# Allegro board PSU-B1-1.brd
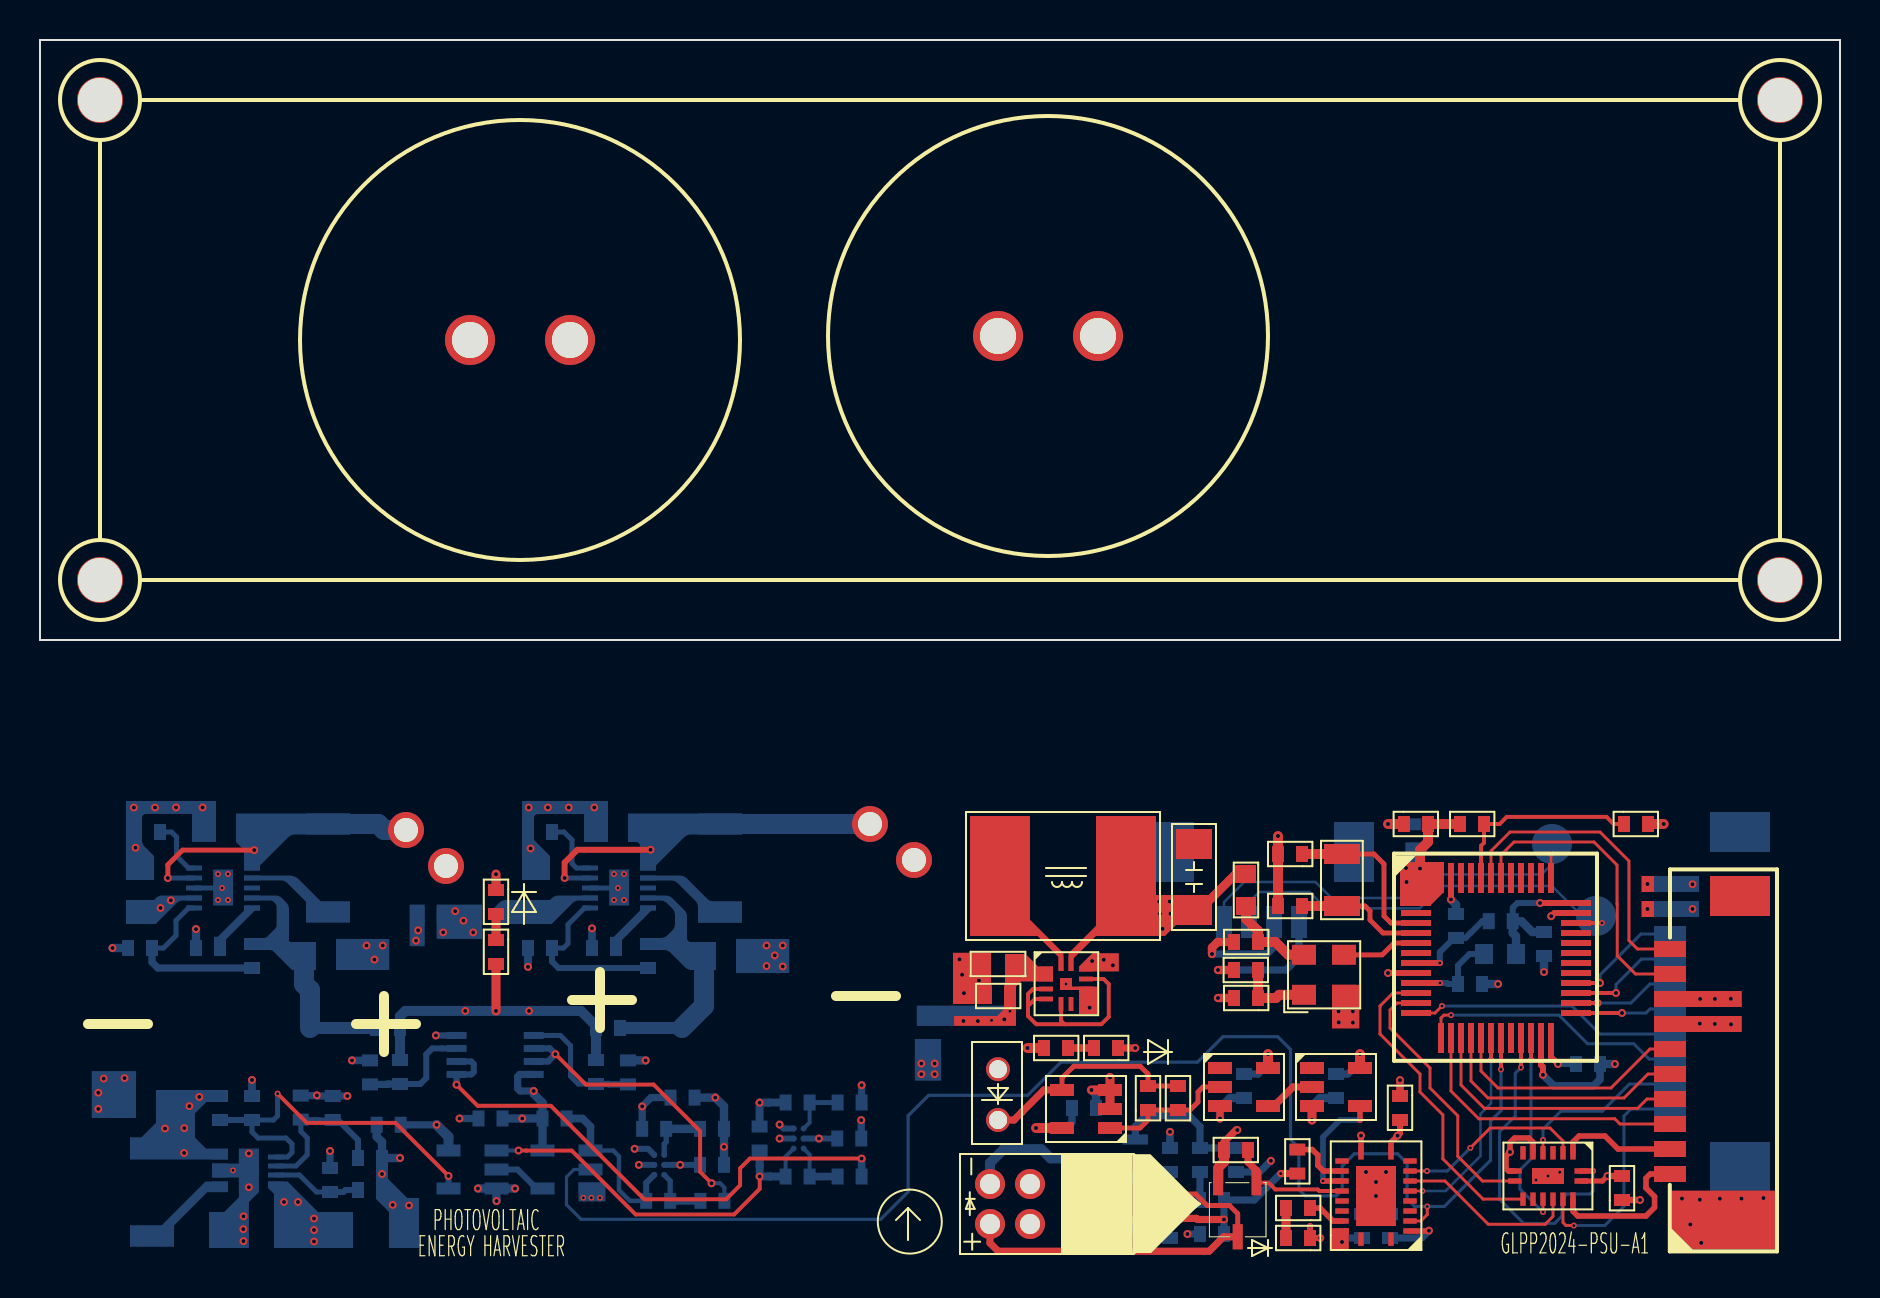
[diagram p0: board, top side]
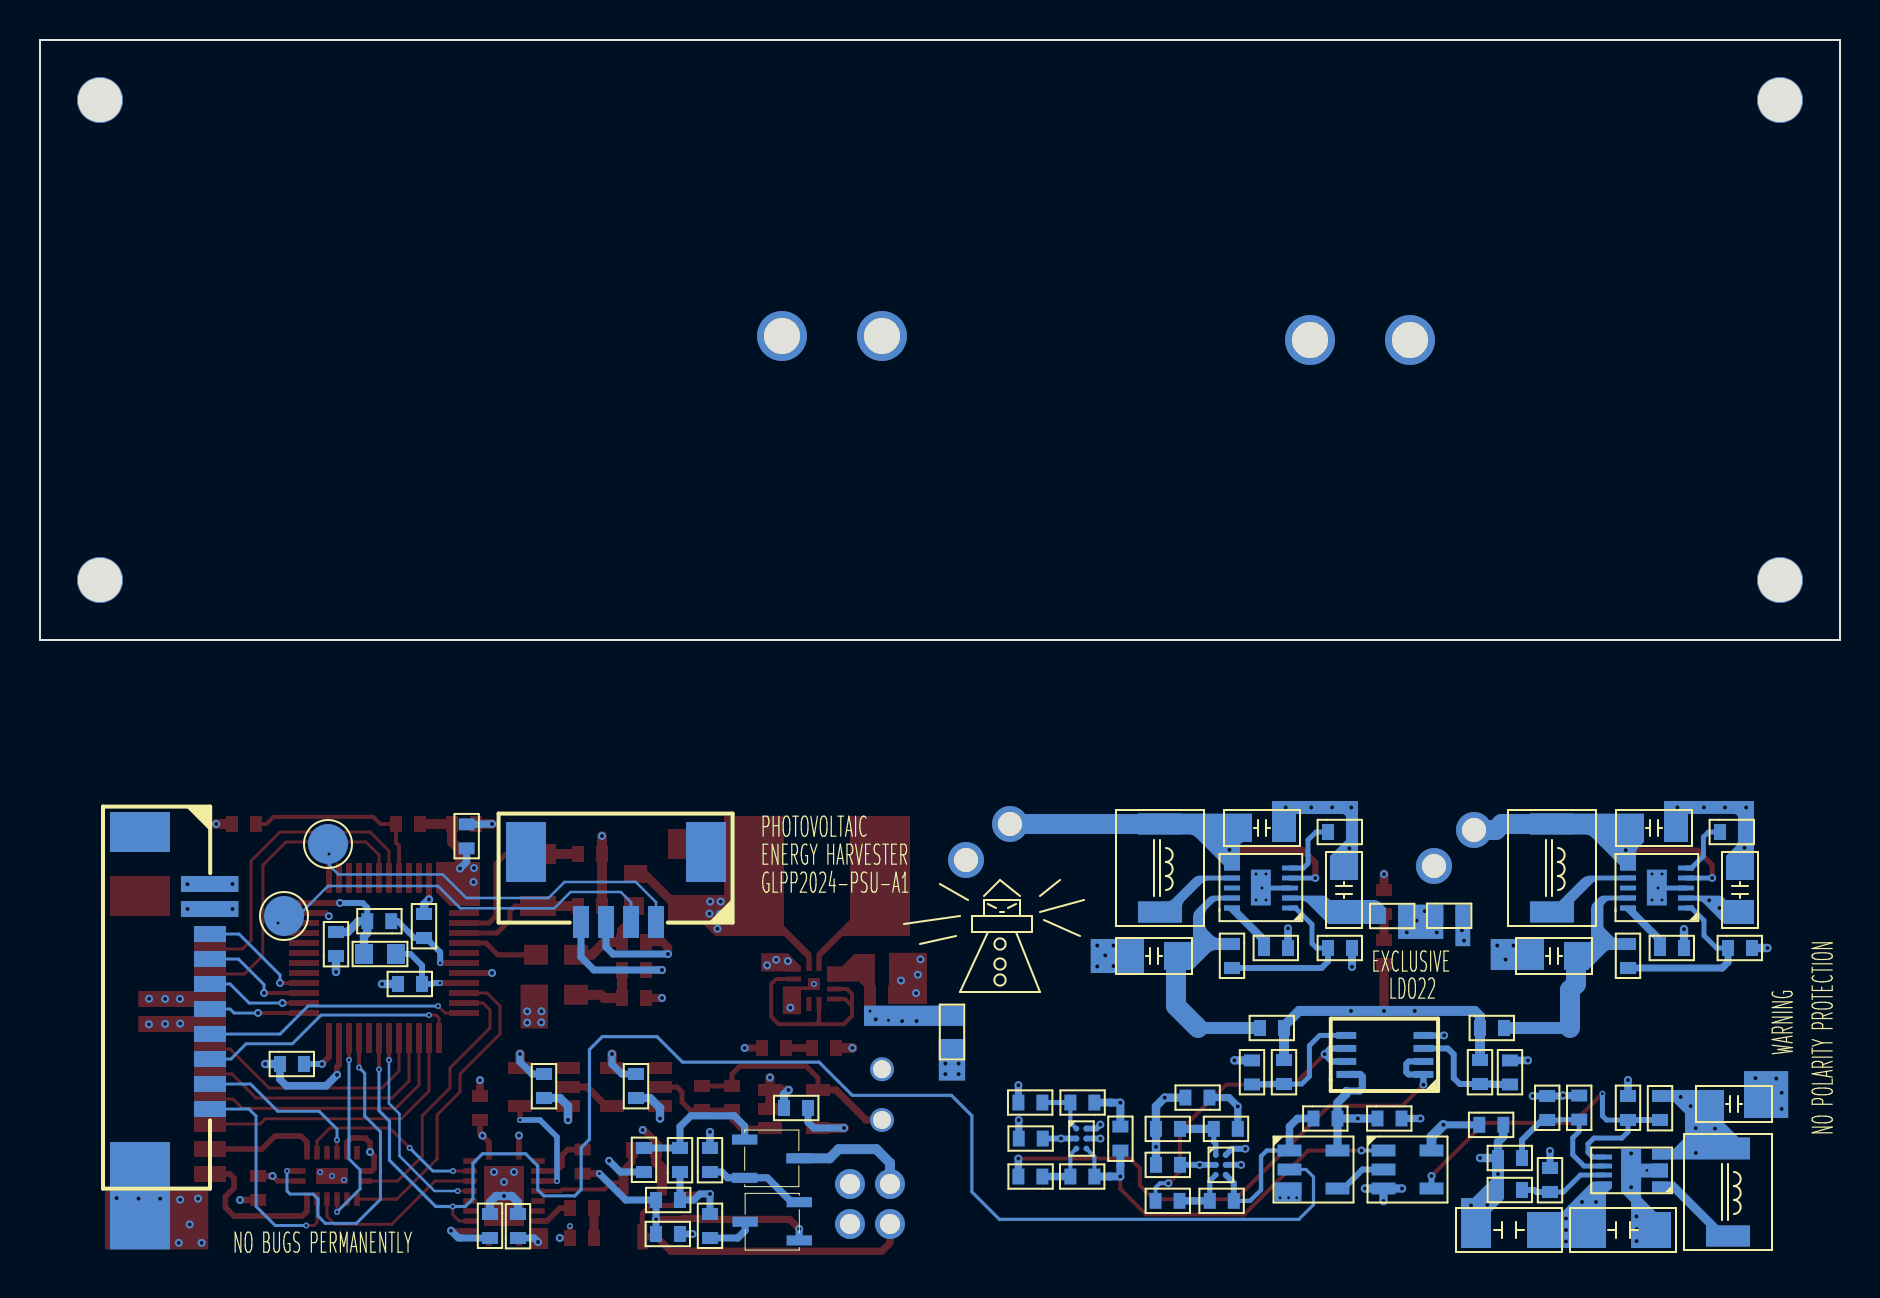
[diagram p1: board, bottom side, seen from below]

Outline 90 x 30 mm; copper layers: TOP, GND, VCC, BOTTOM. Coordinates in mm from the lower left corner of the outline.
Outline path: 0,30 90,30 90,0 0,0 0,30

## Design rules (mm)
constraint set DEFAULT: min track width 0.127
net group N478267: nets N478267 N478271
net group N485107: nets N485107 N485115
net group VCAP1: nets N478345 VCAP1
net group VCAP2: nets N485373 VCAP2
net group BOOST_EN: nets BOOST_EN N478287 N479043 N490401 N490405 VCAP
net group CHG_FULL: nets CHG_FULL LDO22 N490413 N490465 N490853 N490915 N491089 N491653 UV_SHDN
net group FIBER_TX_3V3: nets FIBER_TX_3V3 N527048 N527198 N527202 N527222
net group P1V8: nets N517140 N518111 N602776 P1V8
net group TX_PWR_EN: nets N478365 P3V3 TX_PWR_EN

## Placement (name value [footprint] x y rotation side)
C1  0.1uF  [C0402]  68.2 -9.2 0 top
C2  12pF  [C0402]  63.1 -10.7 180 top
C3  33uF  [C1206]  57.7 -10.2 270 top
C4  12pF  [C0402]  63.1 -13.3 180 top
C5  0.1uF  [C0402]  60.9 -15.1 180 top
C6  10uF  [C0603]  48.7 -16.2 180 top
C7  0.1uF  [C0402]  48.5 -17.8 180 top
C8  4.2V/1F  [SUC_THR_5D0_21D5]  24 15 180 top
C9  4.2V/1F  [SUC_THR_5D0_21D5]  50.4 15.2 0 top
C10  DNI  [C0402]  56.9 -23.5 90 top
C11  0.1uF  [C0402]  68 -22.8 270 top
C12  0.1uF  [C0402]  79.1 -28 90 top
C13  0.1uF  [C0402]  68.67 -9.22 270 bottom
C14  10uF  [C0805]  30 -9.4 180 bottom
C15  10uF  [C0805]  10.4 -9.4 180 bottom
C16  10uF  [C0805]  24.8 -13.6 90 bottom
C17  10uF  [C0805]  5 -13.6 90 bottom
C18  0.1uF  [C0402]  70.8 -14.9 90 bottom
C19  0.1uF  [C0402]  75.2 -15.8 90 bottom
C20  1uF  [C0402]  28.8 -15.4 180 bottom
C21  1uF  [C0402]  9 -15.4 180 bottom
C22  10uF  [C0805]  33.2 -15.8 0 bottom
C23  10uF  [C0805]  13.2 -15.8 0 bottom
C24  0.1uF  [C0402]  72.1 -17.2 180 bottom
C25  0.1uF  [C0402]  78 -21.2 180 bottom
C26  0.1uF  [C0402]  64.8 -22.9 90 bottom
C27  0.1uF  [C0402]  60.2 -22.9 90 bottom
C28  0.1uF  [C0402]  31.53 -22.88 0 bottom
C29  2.2uF  [C0402]  41.08 -23.13 180 bottom
C30  10uF  [C0805]  6.4 -23.2 180 bottom
C31  33pF  [C0402]  14.64 -22.8 270 bottom
C32  0.1uF  [C0402]  51.6 -23.4 0 bottom
C33  0.1uF  [C0402]  23.12 -23.92 180 bottom
C34  0.1uF  [C0402]  18.04 -24.24 180 bottom
C35  2.2uF  [C0402]  34.2 -24.44 180 bottom
C36  0.1uF  [C0402]  41.06 -24.93 180 bottom
C37  0.1uF  [C0402]  34.2 -26.24 180 bottom
C38  0.1uF  [C0402]  67.5 -28.7 270 bottom
C39  0.1uF  [C0402]  66.1 -29.9 90 bottom
C40  22uF  [C1206]  14.9 -29.5 0 bottom
C41  22uF  [C1206]  12.5 -29.5 180 bottom
D1  GREEN LED  [LED0402]  22.8 -12.5 270 top
D2  GREEN LED  [LED0402]  53.9 -20.4 180 top
D3  GREEN LED  [LED0402]  63.5 -29.9 180 top
J1  SIP-1x10  [SMD-1D25-10P-DEG0]  81.5 -26.7 90 top
J2  SIP-1x4  [SMD-1D25-4P-DEG0]  59.2 -14.1 0 bottom
J3  SIP-1x10  [SMD-1D25-10P-DEG0]  81.5 -12.2 270 bottom
L1  33uH/1A  [IND_SMD_7D0X6D6]  54.3 -11.8 180 top
L2  2.2uH  [L0603]  60.3 -11.7 270 top
L3  10uH/1A  [IND_SMD_4D4X4D2]  34 -9.2 270 bottom
L4  10uH/1A  [IND_SMD_4D4X4D2]  14.4 -9.2 270 bottom
L5  2.2uH  [L0603]  73.8 -15.7 180 bottom
L6  2.2uH/500mA  [L0603]  44.4 -20.4 90 bottom
L7  4.7uH/1A  [IND_SMD_4D4X4D2]  5.6 -25.4 270 bottom
LD1  LaserDiode  [AXIAL_2D0_4P]  47.5 -29.2 90 top
NOREF  -  [unnamed]  87 3 0 top
NOREF#2  -  [unnamed]  87 27 0 top
NOREF#3  -  [unnamed]  3 27 0 top
NOREF#4  -  [unnamed]  3 3 0 top
NOREF#5  -  [#2]  0 0 90 top
NOREF#6  -  [#2]  0 30 0 top
PD1  Photodiode  [PD-THR-2P]  47.9 -24 90 top
Q1  Si2301BDS-HXY  [SOT23-3]  61.3 -26.7 180 top
Q2  2SC1815  [SOT23-3]  55.2 -24.5 270 bottom
Q3  2SC1815  [SOT23-3]  51.6 -30.5 90 bottom
R1  DNI  [R0402]  22.8 -15 270 top
R2  DNP  [R0402]  59.7 -16.5 0 top
R3  0R  [R0402]  60.9 -17.9 180 top
R4  2K  [R0402]  51.4 -20.4 180 top
R5  DNI  [R0402]  55.4 -23.5 90 top
R6  10K  [R0402]  59.2 -25.5 0 top
R7  510  [R0402]  62.87 -25.48 270 top
R8  2K  [R0402]  63.5 -28.4 180 top
R9  200K  [R0402]  25.6 -9.6 180 bottom
R10  200K  [R0402]  6 -9.6 180 bottom
R11  10K  [R0402]  72.44 -14.06 0 bottom
R12  1M  [R0402]  25.6 -15.4 180 bottom
R13  1M  [R0402]  5.6 -15.4 180 bottom
R14  2.26M  [R0402]  30.4 -15.2 270 bottom
R15  2.26M  [R0402]  10.6 -15.2 270 bottom
R16  0R  [R0402]  29 -19.4 180 bottom
R17  0R  [R0402]  18 -19.4 180 bottom
R18  1M  [R0402]  29.4 -21.02 270 bottom
R19  1M  [R0402]  27.8 -22.2 90 bottom
R20  1M  [R0402]  18 -22.2 90 bottom
R21  1M  [R0402]  16.5 -21.02 270 bottom
R22  3.3K  [R0402]  37.28 -23.13 0 bottom
R23  1M  [R0402]  13.04 -23.98 90 bottom
R24  100K  [R0402]  10.6 -22.8 270 bottom
R25  DNI  [R0402]  9 -24 90 bottom
R26  22.9K?  [R0402]  26.32 -23.92 180 bottom
R27  3.3K  [R0402]  30.11 -24.44 0 bottom
R28  378K?  [R0402]  35.98 -25.53 90 bottom
R29  562K  [R0402]  17.1 -25.9 180 bottom
R30  510  [R0402]  59.8 -25.4 270 bottom
R31  510  [R0402]  58 -26.6 90 bottom
R32  40.2  [R0402]  56.5 -26.6 90 bottom
R33  200K  [R0402]  39.88 -26.83 0 bottom
R34  998K?  [R0402]  38.48 -26.83 180 bottom
R35  DNI  [R0402]  14.5 -27.6 90 bottom
R36  100K  [R0402]  17.1 -27.5 180 bottom
R37  510  [R0402]  58 -28 0 bottom
R38  3.01K  [R0402]  33.02 -28.04 0 bottom
R39  4.99K  [R0402]  31.51 -28.04 180 bottom
R40  40.2  [R0402]  56.5 -28.7 270 bottom
R41  510  [R0402]  59.2 -29.7 180 bottom
R42  DNP  [R0402]  20.13 -13.79 180 bottom
R43  0R  [R0402]  21.8 -13.8 0 bottom
R44  0R  [R0402]  79.2 -9.2 0 top
R45  DNI  [R0402]  72.2 -9.2 180 top
TP1  Solar Cell V+  [TP_THR_1D8_1D2]  41.5 -9.2 180 bottom
TP2  Solar Cell V+  [TP_THR_1D8_1D2]  18.3 -9.5 180 bottom
TP3  Solar Cell V-  [TP_THR_1D8_1D2]  43.7 -11 180 bottom
TP4  Solar Cell V-  [TP_THR_1D8_1D2]  20.3 -11.3 180 bottom
TP5  T POINT S  [TP_SMD_OD2D0]  75.6 -10.2 180 bottom
TP6  T POINT S  [TP_SMD_OD2D0]  77.8 -13.8 180 bottom
U1  STM32L051C8T6  [LQFP-48]  72.8 -15.9 270 top
U2  LTC3336EV#TRPBF  [LQFN-12-2D0X2D0MM]  51.3 -17.2 0 top
U3  SN74AHC1G14DBVR  [SOT-23-5]  59 -21.4 0 top
U4  SN74AHC1G14DBVR  [SOT-23-5]  63.6 -21.4 0 top
U5  TLV365DBVR  [SOT-23-5]  53.5 -24.4 180 top
U6  TMUX1309BQBR  [WQFN-16-3D5X2D5MM]  75.4 -26.8 180 top
U7  TXS0108ERGYR  [VQFN-20]  66.8 -27.8 90 top
U8  LTC3105EDD#PBF  [DFN-10]  30.4 -13.4 90 bottom
U9  LTC3105EDD#PBF  [DFN-10]  10.6 -13.4 90 bottom
U10  ADA4051-2ARMZ  [MSOP-8]  24.44 -21.72 90 bottom
U11  ADCMP380-1ACBZ-RL7  [WLCSP-6]  38.18 -24.43 180 bottom
U12  ADCMP380-1ACBZ-RL7  [WLCSP-6]  31.21 -25.74 180 bottom
U13  SN74LVC1G32DBVR  [SOT-23-5]  27.52 -25.52 180 bottom
U14  SN74AUP1G08DBVR  [SOT-23-5]  22.82 -25.52 180 bottom
U15  LTC3539EDCB#PBF  [DFN-8]  11.8 -27.2 90 bottom
Y1  32.768KHz  [SMD3215-2P]  65.1 -10.7 270 top
Y2  32.0MHz_X1G0041710040  [SMD2520-4P]  64.2 -16.7 0 top

## Library data of the parts
C1-C7 C10-C13 C19 C25-C27 C32-C34 C38 C39 = CAP NP
C8 C9 C14-C18 C22-C24 C30 = CAP NP: signal model: DEFAULT_CAPACITOR_1e+07pF_2_1
C20 C21 = CAP NP: signal model: DEFAULT_CAPACITOR_1e+06pF_2_1
C28 C36 C37 = CAP NP: signal model: DEFAULT_CAPACITOR_100000pF_2_1
C29 C35 = CAP NP: signal model: DEFAULT_CAPACITOR_2.2e+06pF_2_1
C31 = CAP NP: signal model: DEFAULT_CAPACITOR_33.000000pF_2_1
C40 C41 = CAP NP: signal model: DEFAULT_CAPACITOR_2.2e+07pF_2_1
D1-D3 = LED
J1 J3 = SIP-1x10
J2 = SIP-1x4
L1 L2 L6 = INDUCTOR
L3 L4 = INDUCTOR: signal model: DEFAULT_INDUCTOR_10000nH_2_1
L5 L7 = INDUCTOR: signal model: DEFAULT_INDUCTOR_4700nH_2_1
LD1 = LaserDiode
PD1 = Photodiode
Q1 = FH3415A
Q2 Q3 = 2SC1815
R1-R5 R8 R16 R17 R42 R43 = R
R6 R24-R26 R28 R35 R36 = R: signal model: DEFAULT_RESISTOR_10000OHM_2_1
R7 R30 R31 R37 R41 = R: signal model: DEFAULT_RESISTOR_510.000000OHM_2_1
R9 R10 = R: signal model: DEFAULT_RESISTOR_200000OHM_2_1
R11-R13 R18-R21 R23 R44 R45 = R: signal model: DEFAULT_RESISTOR_0.001OHM_2_1
R14 R15 = R: signal model: DEFAULT_RESISTOR_0.00226OHM_2_1
R22 R27 = R: signal model: DEFAULT_RESISTOR_3300OHM_2_1
R29 = R: signal model: DEFAULT_RESISTOR_562000OHM_2_1
R32 R40 = R: signal model: DEFAULT_RESISTOR_40.000000OHM_2_1
R33 R38 = R: signal model: DEFAULT_RESISTOR_36000OHM_2_1
R34 R39 = R: signal model: DEFAULT_RESISTOR_147000OHM_2_1
TP1-TP4 = T POINT A
TP5 TP6 = T POINT S
U1 = STM32L051C8T6
U2 = LTC3336
U3 U4 = SN74AHC1G14DBVR
U5 = TLV365DBVR
U6 = TMUX1309
U7 = TXS0108ERGYR
U8 U9 = LTC3105EDD#PBF
U10 = ADA4051-2ARMZ
U11 U12 = ADCMP380-1ACBZ-RL7
U13 = SN74LVC1G32DBVR
U14 = SN74AUP1G08
U15 = LTC3539EDCB#PBF
Y1 = CRYSTAL
Y2 = OSCILLATOR

## Footprints (pads in the part's own frame, mm; a bottom-side part is the same pattern mirrored in y, then rotated)
AXIAL_2D0_4P
  round 1.5 hole 1: 1(0,0) 2(2,0) 3(0,-2) 4(2,-2)
C0402
  rect 0.6x0.8 smd: 1(0,0) 2(1.2,0)
C0603
  rect 0.9x1 smd: 1(0,0) 2(1.6,0)
C0805
  rect 1.2x1.4 smd: 1(0,0) 2(2.2,0)
C1206
  rect 1.5x1.8 smd: 1(0,0) 2(3.3,0)
DFN-8
  rect 0.25x0.8 smd: 1(0,-2.8) 2(0.45,-2.8) 3(0.9,-2.8) 4(1.35,-2.8) 5(1.35,0) 6(0.9,0) 7(0.45,0) 8(0,0)
  rect 1.2x1 smd: 9(0.676,-1.355)
DFN-10
  rect 0.25x0.8 smd: 1(0,-2.9) 2(0.5,-2.9) 3(1,-2.9) 4(1.5,-2.9) 5(2,-2.9) 6(2,0) 7(1.5,0) 8(1,0) 9(0.5,0) 10(0,0)
  rect 1.8x1 smd: 11(1.022,-1.444)
IND_SMD_4D4X4D2
  rect 1.05x2.2 smd: 1(0,0) 2(4.4,0)
IND_SMD_7D0X6D6
  rect 3x6 smd: 1(0,0) 2(6.3,0)
L0603
  rect 0.9x1 smd: 1(0,0) 2(1.6,0)
LED0402
  rect 0.6x0.8 smd: 1(0,0) 2(1.2,0)
LQFN-12-2D0X2D0MM
  rect 0.7x0.25 smd: 1(-1,0.75) 2(-1,0.25) 3(-1,-0.25) 4(-1,-0.75) 7(1,-0.75) 8(1,-0.25) 9(1,0.25) 10(1,0.75)
  rect 0.25x0.7 smd: 5(-0.25,-1) 6(0.25,-1) 11(0.25,1) 12(-0.25,1)
  rect 0.6x0.6 smd: 13(0,0)
LQFP-48
  rect 0.3x1.5 smd: 1(-2.75,-4) 2(-2.25,-4) 3(-1.75,-4) 4(-1.25,-4) 5(-0.75,-4) 6(-0.25,-4) 7(0.25,-4) 8(0.75,-4) 9(1.25,-4) 10(1.75,-4) 11(2.25,-4) 12(2.75,-4) 25(2.75,4) 26(2.25,4) 27(1.75,4) 28(1.25,4) 29(0.75,4) 30(0.25,4) 31(-0.25,4) 32(-0.75,4) 33(-1.25,4) 34(-1.75,4) 35(-2.25,4) 36(-2.75,4)
  rect 1.5x0.3 smd: 13(4,-2.75) 14(4,-2.25) 15(4,-1.75) 16(4,-1.25) 17(4,-0.75) 18(4,-0.25) 19(4,0.25) 20(4,0.75) 21(4,1.25) 22(4,1.75) 23(4,2.25) 24(4,2.75) 37(-4,2.75) 38(-4,2.25) 39(-4,1.75) 40(-4,1.25) 41(-4,0.75) 42(-4,0.25) 43(-4,-0.25) 44(-4,-0.75) 45(-4,-1.25) 46(-4,-1.75) 47(-4,-2.25) 48(-4,-2.75)
MSOP-8
  rect 0.35x1 smd: 1(-0.001,-3.615) 2(0.649,-3.615) 3(1.299,-3.615) 4(1.949,-3.615) 5(1.949,0.241) 6(1.299,0.241) 7(0.649,0.241) 8(-0.001,0.241)
PD-THR-2P
  round 1.2 hole 0.9: 1(0,0) 2(2.54,0)
R0402
  rect 0.6x0.8 smd: 1(0,0) 2(1.2,0)
SMD2520-4P
  rect 1.2x1 smd: 1(-1,-1.04) 2(1,-1.04) 3(1,0.96) 4(-1,0.96)
SMD3215-2P
  rect 1x1.8 smd: 1(0,0) 2(2.6,0)
SMD-1D25-4P-DEG0
  rect 0.8x1.6 smd: 1(0,0) 2(1.25,0) 3(2.5,0) 4(3.75,0)
  rect 2x3 smd: 5(6.5,-3.5) 6(-2.5,-3.5)
SMD-1D25-10P-DEG0
  rect 0.8x1.6 smd: 1(0,0) 2(1.25,0) 3(2.5,0) 4(3.75,0) 5(5,0) 6(6.25,0) 7(7.5,0) 8(8.75,0) 9(10,0) 10(11.25,0)
  rect 2x3 smd: 11(-2.6,-3.5) 12(13.9,-3.5)
SOT23-3
  rect 0.51x1.27 smd: 1(0.476,0.434) 2(2.391,0.434) 3(1.415,3.142)
SOT-23-5
  rect 1.2x0.6 smd: 1(0,0) 2(0,-0.95) 3(0,-1.9) 4(2.4,-1.9) 5(2.4,0)
SUC_THR_5D0_21D5
  round 2.5 hole 1.8: 1(-2.5,0) 2(2.5,0)
TP_SMD_OD2D0
  round 2 smd: 1(0,0)
TP_THR_1D8_1D2
  round 1.8 hole 1.2: 1(0,0)
unnamed
  round 2.3 hole 2.2 unplated: (0,0)
VQFN-20
  rect 0.68x0.28 smd: 1(-2.157,-0.75) 10(2.158,-0.75) 11(2.158,0.75) 20(-2.157,0.75)
  rect 0.28x0.68 smd: 2(-1.75,-1.7) 3(-1.25,-1.7) 4(-0.75,-1.7) 5(-0.25,-1.7) 6(0.25,-1.7) 7(0.75,-1.7) 8(1.25,-1.7) 9(1.75,-1.7) 12(1.75,1.7) 13(1.25,1.7) 14(0.75,1.7) 15(0.25,1.7) 16(-0.25,1.7) 17(-0.75,1.7) 18(-1.25,1.7) 19(-1.75,1.7)
  rect 3x2 smd: EPAD(0,0)
WLCSP-6
  round 0.3 smd: A1(0,0) A2(0.5,0) B1(0,-0.5) B2(0.5,-0.5) C1(0,-1) C2(0.5,-1)
WQFN-16-3D5X2D5MM
  rect 0.68x0.28 smd: 1(-1.658,-0.25) 8(1.657,-0.25) 9(1.657,0.25) 16(-1.658,0.25)
  rect 0.28x0.68 smd: 2(-1.25,-1.158) 3(-0.75,-1.158) 4(-0.25,-1.158) 5(0.25,-1.158) 6(0.75,-1.158) 7(1.25,-1.158) 10(1.25,1.157) 11(0.75,1.157) 12(0.25,1.157) 13(-0.25,1.157) 14(-0.75,1.157) 15(-1.25,1.157)
  rect 1.6x0.8 smd: EPAD(0,0)

## Nets
GND: C1.1 C2.2 C3.1 C4.2 C5.2 C6.2 C7.2 C8.2 C9.2 C11.1 C12.1 C13.1 C14.2 C15.2 C16.2 C17.2 C18.2 C19.1 C20.2 C21.2 C22.2 C23.2 C24.1 C25.1 C26.1 C27.1 C28.2 C29.1 C30.2 C32.2 C33.2 C34.2 C35.1 C36.1 C37.1 C38.1 C39.2 C40.2 C41.2 D1.1(CATHODE) D2.1(CATHODE) D3.1(CATHODE) J1.8 J1.11 J1.12 J2.3 J2.5 J2.6 J3.2 J3.11 J3.12 PD1.2 R3.2 R9.2 R10.2 R12.2 R13.2 R18.1 R21.1 R24.1 R29.1 R30.2 R32.2 R36.1 R41.2 R44.2 TP3.1(TP) TP4.1(TP) U1.8(VSSA) U1.23 U1.35 U1.47 U2.7 U2.8 U2.10 U2.13 U3.3 U4.3 U5.2 U5.3 U6.6 U6.8 U6.EPAD U7.11 U7.EPAD U8.3 U8.11 U9.3 U9.11 U10.4(V-) U11.A2 U11.B2 U12.A2 U12.B2 U13.3 U14.3 U15.2 U15.3 U15.9 Y2.2
P1V8: C1.2 C3.2 C11.2 C12.2 C13.2 C19.2 C25.2 C38.2 J2.4 L1.1 L2.1 L5.1 R2.1 R11.2 R45.2 U1.1 U1.24 U1.36 U1.48 U2.11(VOUT) U6.16(VDD) U7.2 U7.10
P3V3: C26.2 C27.2 C31.1 C32.1 C39.1 C40.1 C41.1 J1.7 J3.1 L6.1 Q1.2(S) R4.2 R6.1 R23.2 U3.5 U4.5 U5.5 U7.19(VCCB) U15.8(VOUT)
BOOST_EN: R24.2 R25.1 U14.4(Y) U15.5
CHG_FULL: R26.1 R39.2 U12.C2 U13.1
FIBER_RX: U6.13 U7.7
FIBER_RX_3V3: U4.4(Y) U7.14
FIBER_TX: U6.3 U7.8
FIBER_TX_3V3: R7.1 U7.13
I2C1_SCL: J1.9 U1.42
I2C1_SDA: J1.10 U1.43
IAM_ALIVE: U1.19 U7.3 U13.2
IR_UART_RX: J3.10 U6.14
IR_UART_TX: J3.9 U6.5
LDO22: C28.1 C33.1 C34.1 C36.2 C37.2 R22.1 R26.2 R27.1 R28.2 R42.1 R43.1 U10.8 U11.B1 U12.B1 U13.5 U14.5
LDO22-1: C17.1 R42.2 U9.2
LDO22-2: C16.1 R43.2 U8.2
LPUART1_RX: U1.22 U6.12
LPUART1_TX: U1.21 U6.1
OV_UART_RX: J1.1 U6.15
OV_UART_TX: J1.2 U6.2
ROUTE_A0: U1.10 U6.10
ROUTE_A1: U1.11 U6.9
SPI1_MISO: J1.5 U1.16
SPI1_MOSI: J1.6 U1.17
SPI1_NSS: J1.3 U1.14
SPI1_SCK: J1.4 U1.15
SPI2_MISO: J3.4 U1.27
SPI2_MOSI: J3.3 U1.28
SPI2_NSS: J3.6 U1.25
SPI2_SCK: J3.5 U1.26
SYS_SWCLK: J2.1 TP5.1(TP) U1.37
SYS_SWDIO: J2.2 TP6.1(TP) U1.34
TX_EN: U1.18 U7.6
TX_PWR_EN: Q1.1 R6.2 U7.15
USART1_RX: U1.31
USART1_TX: U1.30
USART2_RX: J3.8 U1.13
USART2_TX: J3.7 U1.12
UV_SHDN: R28.1 R34.2 U11.C2 U14.1
VCAP: C30.1 L7.1 R1.2 R16.2 R17.1 R19.2 R20.2 R25.2 R35.2 U15.4
VCAP1: C8.1 C23.1 R15.1 R17.2 U9.9(VOUT)
VCAP2: C9.1 C22.1 R14.1 R16.1 U8.9(VOUT)
N478267: C15.1 L4.1 TP2.1(TP) U9.4 U9.6
N478271: L4.2 U9.7
N478287: L7.2 U15.1
N478345: R13.1 R15.2 U9.1
N478365: C31.2 R23.1 R29.2 U15.6
N478369: R10.1 U9.5
N478385: C21.1 U9.10
N479043: R35.1 R36.2 U15.7
N485107: C14.1 L3.1 TP1.1(TP) U8.4 U8.6
N485115: L3.2 U8.7
N485373: R12.1 R14.2 U8.1
N485445: R9.1 U8.5
N485483: C20.1 U8.10
N490401: R18.2 R19.1 U10.5
N490405: R20.1 R21.2 U10.3
N490413: C29.2 R22.2 U11.A1(VCC)
N490465: R33.2 U10.1 U10.2
N490853: R33.1 R34.1 U11.C1
N490915: R38.2 U10.6 U10.7
N490953: U13.4(Y) U14.2
N491089: C35.2 R27.2 U12.A1(VCC)
N491611: C6.1 C7.1 L6.2 U2.1 U2.2
N491653: R38.1 R39.1 U12.C1
N492211: L1.2 U2.12
N492453: U2.3 U2.4 U2.5 U2.9
N504730: C2.1 U1.3 Y1.1
N504882: C4.1 U1.4 Y1.2
N512213: U1.5 Y2.3
N512221: R2.2 R3.1 Y2.1
N512229: C5.1 L2.2 Y2.4(VDD)
N517140: C24.2 L5.2 U1.9
N518111: C18.1 R11.1 U1.7
N527048: LD1.1 Q1.3 R31.1 R37.1 R40.1
N527184: LD1.2 Q2.3
N527198: Q3.1 R7.2 R37.2 R41.1
N527202: Q3.3 R40.2
N527222: Q2.1 R30.1 R31.2
N527434: Q2.2(E) Q3.2(E) R32.1
N541574: D3.2 R8.2
N546758: C10.2 PD1.1 R5.2 U5.4
N546765: C10.1 R5.1 U3.2 U5.1(VOUT)
N549679: U3.4(Y) U4.2
N554827: D2.2 R4.1
N555295: D1.2 R1.1
N563900: R8.1 U7.18
N602776: R44.1 R45.1 U1.44

Pads without a net: LD1 3 4; U1 2 6 20 29 32 33 38 39 40 41 45 46; U2 6; U3 1; U4 1; U6 4 7 11; U7 1 4 5 9 12 16 17 20; U8 8; U9 8

## Via types
v1: diameter 0.4, hole 0.2, TOP to BOTTOM, 187 vias
v2: diameter 0.3, hole 0.15, TOP to BOTTOM, 43 vias

## Routing (per net, layer and track width the routed paths; a pad name or vN(x,y) marks a point on that pad's centre or on a via; arc(x,y) is an arc through that point)
GND: length 76
  TOP w0.28: U6.8 73.43,-26.55 73.3,-26.42 73.3,-25.8 v1(73.5,-25.6) 73.5,-25.13 73.73,-24.9 74.44,-24.9 74.65,-25.11 U6.6 ; U7.11 v1(66.05,-24.78)
  TOP w0.3: v1(64.01,-29.9) D3.1 v2(63.5,-29.3) ; v1(75.15,-21.74) 75.15,-21.74 75.15,-21.35 75.05,-21.25 U1.23 ; v1(75.56,-13.81) 75.72,-13.65 U1.35 ; U1.8 v1(67.4,-16.65) ; U1.47 v1(70.55,-12.98)
  TOP w0.32: C12.1 v1(80,-28)
  TOP w0.36: U3.3 v1(59,-23.93) ; D2.1 v1(54.77,-20.4)
  TOP w0.38: C11.1 v1(68,-22.01)
  TOP w0.42: C5.2 58.88,-15.1 58.6,-15.38 v1(58.6,-15.7) ; R3.2 v1(58.9,-17.9)
  TOP w0.46: D1.1 v1(22.8,-11.71) ; U5.3 v1(52.57,-22.5) ; U5.3 v1(53.5,-21.87) ; U5.3 U5.2 ; U4.3 v1(63.6,-24)
  TOP w0.5: C1.1 v1(67.4,-9.2) ; R44.2 v1(81.19,-9.2) ; v1(61.9,-9.8) C2.2 C4.2
  BOTTOM w0.25: U9.3 v2(9.1,-12.4) ; U8.3 v2(28.9,-12.4)
  BOTTOM w0.3: U12.A2 30.41,-25.44 v1(29.73,-25.44) ; U12.B2 v1(29.95,-26.24) ; U11.A2 37.18,-24.43 v1(36.98,-24.23) ; U11.B2 v1(36.98,-24.93)
  BOTTOM w0.32: U10.4 v1(19.8,-19.77)
  BOTTOM w0.36: C36.1 v1(41.06,-24) ; C33.2 v1(20.98,-23.92) ; v1(67.4,-9.2) 67.94,-9.2 67.96,-9.22 C13.1 ; R30.2 60.98,-26.6 v1(61.54,-26.04) ; C29.1 v1(41.08,-22.26) ; R41.2 v1(57.37,-29.7) ; J2.3 61.7,-15.35 61.35,-15.7 v1(58.6,-15.7)
  BOTTOM w0.38: R21.1 v1(15.6,-21.02) ; v1(75.15,-21.74) 75.69,-22.29 77.68,-22.29 78,-21.97 C25.1 ; R24.1 v1(10.6,-22) ; C20.2 v1(27.6,-14.42) ; R32.2 v1(56.5,-24.59)
  BOTTOM w0.4: R12.2 v1(24.4,-16.34)
  BOTTOM w0.42: C26.1 64,-22.9 U4.3 v1(63.6,-24) ; v1(18,-25.9) R29.1 17.1,-25.1 16.84,-24.83 C34.2 ; C39.2 66.1,-28.11 66.41,-27.8 v1(66.8,-27.8) 67.19,-27.8 67.5,-28.11 C38.1 ; v1(52.57,-22.5) 52.8,-22.73 C32.2 ; v1(70.55,-12.98) 70.8,-13.23 C18.2 ; v1(59,-23.93) 59,-23.4 59.5,-22.9 C27.1 ; v1(7.8,-14.46) C21.2 ; C24.1 v1(72.9,-17.2) ; U14.3 v1(22.82,-28.05) ; U14.3 v1(21.9,-27.42) ; U14.3 v1(23.75,-27.42) ; R13.2 v1(3.63,-15.4) ; R18.1 v1(30.28,-21.02) ; 32.73,-22.88 v1(33.76,-22.88) 34.2,-23.32 C35.1 v1(34.2,-25.34) C37.1 ; C19.1 v1(75.2,-16.6) ; C25.1 v1(78.75,-21.2)
  vias: v1(2.92,-22.64) v1(2.92,-23.45) v1(3.19,-21.93) v1(4.23,-21.91) v1(4.69,-8.38) v1(4.78,-10.39) v1(5.75,-8.38) v1(6.8,-8.37) v1(8.13,-8.37) v1(10.18,-28.82) v1(10.17,-29.46) v1(10.17,-30.06) v1(10.44,-25.67) v1(10.45,-27.36) v1(16.33,-15.28) v1(16.72,-15.98) v1(17.14,-15.28) v1(17.1,-26.7) v1(17.63,-28.25) v1(18.45,-28.27) v1(24.44,-8.38) v1(24.53,-10.42) v1(25.39,-8.37) v1(26.44,-8.37) v1(27.71,-8.38) v1(36.33,-15.28) v1(36.33,-16.3) v1(36.74,-15.77) v1(37.14,-15.28) v1(37.14,-16.32) v1(45.98,-15.97) v1(46.1,-16.74) v1(46.2,-17.66) v1(46.95,-17.03) v1(52.48,-18.38) v1(52.61,-16.05) v1(53.19,-15.99) v1(53.64,-16.27) v1(64.93,-18.57) v1(64.94,-19.12) v1(65.64,-18.57) v1(65.64,-19.13) v1(66.3,-26.6) v1(66.8,-27.1) v1(67.3,-26.6) v1(80.37,-13.45) v1(81.92,-30.14) v1(82.1,-27.93) v1(82.52,-29.22) v1(82.63,-13.45) v1(83.01,-17.95) v1(82.99,-27.98) v1(83.06,-30.14) v1(83.74,-17.95) v1(83.99,-27.93) v1(84.54,-17.94) v1(85.07,-27.93) v1(86.17,-27.9) v2(8.9,-11.7) v2(8.9,-13) v2(9.4,-11.7) v2(9.4,-13) v2(9.65,-26.52) v2(27.16,-27.89) v2(27.57,-27.89) v2(28,-27.89) v2(28.7,-11.7) v2(28.7,-13) v2(29.2,-11.7) v2(29.2,-13) v2(51.3,-17.2) v2(74.8,-27.01) v2(75.4,-26.8) v2(75.99,-26.61)
P1V8: length 91.3
  TOP w0.26: v1(78.37,-26.8) 78.12,-27.05 U6.16
  TOP w0.28: U7.2 69.43,-29.55 v1(69.45,-29.53) ; U7.10 67.55,-25.11 v1(67.88,-24.78)
  TOP w0.3: v1(75,-13.15) U1.36 ; v1(75.9,-21.2) 75.55,-20.85 U1.24 ; v1(67.88,-24.78) 68,-24.66 C11.2
  TOP w0.32: C12.2 v1(78.37,-26.8)
  TOP w0.42: R2.1 v1(58.9,-16.5)
  TOP w0.5: v1(69,-11.43) 69,-10.5 69.4,-10.1 C1.2 R45.2
  VCC w0.127: v1(56.13,-14.44) 56.4,-14.16 56.6,-14.16 56.97,-13.79 59.01,-13.79 60.09,-14.87 60.09,-15.76 59.35,-16.5 v1(58.9,-16.5) ; 73.26,-13.92 73.43,-14.09 74.34,-14.09 75.9,-15.65 75.9,-19.51 ; 73.26,-13.92 74.03,-13.15 v1(75,-13.15) ; 73.26,-13.92 70.19,-13.92 69,-12.73 v1(69,-11.43) ; 69.61,-24.1 68.93,-24.78 v1(67.88,-24.78) ; 69.61,-24.1 70.53,-23.19 75.84,-23.19 77,-22.03 77,-21.78 ; 69.61,-24.1 70.15,-24.64 70.15,-28.84 v1(69.45,-29.53) ; 77,-21.78 77,-20.61 75.9,-19.51 ; 77,-21.78 78.37,-23.15 v1(78.37,-26.8) ; 75.9,-19.51 v1(75.9,-21.2) ; v1(68.3,-11.4) 61.29,-11.4 59.15,-13.54 56.95,-13.54 v1(56.49,-13.08)
  VCC w0.3: v1(75,-13.15) 74.7,-13.45 74.7,-13.8
  BOTTOM w0.3: v1(75.9,-21.2) 75.94,-21.2 C25.2 ; R11.2 73.64,-13.38 73.87,-13.15 v1(75,-13.15)
  BOTTOM w0.36: J2.4 62.95,-15.85 62.3,-16.5 v1(58.9,-16.5) ; C38.2 68.95,-29.9 68.96,-29.89 69.09,-29.89 v1(69.45,-29.53) ; C13.2 68.67,-11.09 v1(69,-11.43)
  BOTTOM w0.42: L5.1 73.8,-14.81 73.64,-14.65 R11.2 74.07,-14.06 74.61,-14.6 C19.2
  vias: v1(55.97,-13.08) v1(56,-13.69) v1(56.52,-13.68) v1(68.33,-12.1)
P3V3: length 16.4
  TOP w0.36: R6.1 59.2,-25.1 59.8,-24.5 v1(59.87,-24.5)
  TOP w0.5: Q1.2 58.91,-26.39 59.2,-26.1 R6.1 ; R4.2 v1(49.38,-20.4) ; U4.5 v1(66,-20.7) ; v1(49.8,-24.4) U5.5 ; U3.5 v1(61.4,-20.7)
  BOTTOM w0.36: v1(49.8,-24.4) 51.31,-24.4 51.6,-24.11 C32.1 ; v1(65.1,-30.1) 65.3,-29.9 C39.1 ; v1(61.4,-20.7) 61.4,-21.21 60.91,-21.7 C27.2 ; v1(15.37,-22.8) C31.1 13.88,-22.8 v1(13.85,-22.77) 13.83,-22.78 R23.2 ; v1(66,-20.7) 66,-21.09 65.39,-21.7 C26.2
  vias: v1(12.2,-28.1) v1(12.9,-28.1) v1(13.7,-28.93) v1(13.7,-29.5) v1(13.7,-30.07) v1(44.07,-21.18) v1(44.07,-21.71) v1(44.73,-21.18) v1(44.73,-21.71) v1(80.37,-12.2) v1(82.63,-12.21) v1(82.99,-19.18) v1(83.74,-19.2) v1(84.55,-19.22)
BOOST_EN: length 19.1
  TOP w0.2: v2(11.88,-22.68) 13.34,-24.14 17.77,-24.14 v1(20.43,-26.8)
  BOTTOM w0.25: v2(11.88,-22.68) 11.88,-23.79 11.67,-24 R24.2 10.6,-24.6 10.9,-24.9 12.3,-24.9 12.6,-25.2 12.6,-25.63 12.38,-25.85 U15.5
  BOTTOM w0.3: R25.1 R24.2 ; U14.4 v1(20.43,-26.8)
CHG_FULL: length 8.8
  BOTTOM w0.22: U13.1 28.66,-25.52 28.95,-25.82 28.95,-27.5 29.49,-28.04 R39.2
  BOTTOM w0.3: R39.2 30.31,-27.14 U12.C2
  BOTTOM w0.38: U13.1 27.52,-24.33 27.12,-23.92 R26.1
FIBER_RX: length 9.1
  TOP w0.15: U7.7 70.25,-27.05 72.42,-29.22 75.25,-29.22 75.65,-28.82 U6.13
FIBER_RX_3V3: length 6.1
  TOP w0.28: v2(66,-24) U4.4 ; U7.14 v2(64.15,-27.05)
  BOTTOM w0.28: v2(66,-24) 65,-24 64.15,-24.85 v2(64.15,-27.05)
FIBER_TX: length 9.4
  TOP w0.15: v2(71.52,-25.39) 72.51,-24.4 75.5,-24.4 76.15,-25.05 U6.3 ; U7.8 v2(69.35,-26.55)
  BOTTOM w0.15: v2(69.35,-26.55) 70.36,-26.55 v2(71.52,-25.39)
FIBER_TX_3V3: length 3
  TOP w0.28: R7.1 63.62,-25.48 63.9,-25.76 63.9,-26.27 64.17,-26.55 U7.13
I2C1_SCL: length 15.3
  TOP w0.15: J1.9 79.77,-16.7 78.86,-15.79 78.86,-13.2 78.85,-13.2 78.85,-11.25 77.7,-10.1 73.7,-10.1 73.05,-10.75 U1.42
I2C1_SDA: length 15.4
  TOP w0.15: U1.43 72.55,-10.55 73.5,-9.6 78,-9.6 79.45,-11.05 79.45,-15.02 79.88,-15.45 J1.10
IAM_ALIVE: length 74.8
  TOP w0.15: v2(69.36,-28.32) 69.36,-28.73 69.04,-29.05 U7.3
  TOP w0.2: U1.19 v2(73.05,-21.47)
  BOTTOM w0.16: U13.2 26.7,-26.48 26.32,-26.85 26.32,-28.24 27.05,-28.97 42.03,-28.97 43.41,-27.59 43.41,-23.79 44.43,-22.77 49.38,-22.77 51.04,-21.11 57.88,-21.11 59.15,-19.83 61.88,-19.83 62.53,-20.48 62.53,-24.97 62.94,-25.39 62.94,-27.48 63.26,-27.79 64.81,-27.79 65.11,-27.49 65.11,-26.3 65.72,-25.69 67.88,-25.69 68.35,-26.16 68.35,-27.94 68.74,-28.32 v2(69.36,-28.32) 70.22,-28.32 72.53,-26.01 72.53,-24.06 73.05,-23.53 v2(73.05,-21.47)
IR_UART_RX: length 11.6
  TOP w0.15: U6.14 76.15,-29.13 76.3,-29.28 v2(76.69,-29.28)
  BOTTOM w0.15: J3.10 79.55,-23.45 79.2,-23.8 79.2,-28.32 78.24,-29.28 v2(76.69,-29.28)
IR_UART_TX: length 8.5
  TOP w0.15: U6.5 v2(75.15,-25)
  BOTTOM w0.15: v2(75.15,-25) 75.15,-24.45 76.04,-23.56 78.11,-23.56 79.47,-22.2 J3.9
LDO22: length 19.5
  BOTTOM w0.3: C36.2 v1(38.95,-24.93) U11.B1 ; U12.B1 v1(32.01,-26.24) C37.2
  BOTTOM w0.36: U10.8 23.99,-21.72 23.88,-21.83 23.88,-22.42 24.01,-22.55 v1(24.68,-22.55) ; C28.1 30.55,-22.88 v1(30.11,-23.32) R27.1 ; v1(19.83,-24.24) C34.1
  BOTTOM w0.4: R28.2 v1(35.98,-23.13) 36.44,-23.13 36.44,-23.13 R22.1
  BOTTOM w0.42: v1(24.68,-22.55) 24.68,-22.7 25.12,-23.13 R26.2 ; U13.5 R26.2 ; R26.2 v1(24.11,-23.92) C33.1
  BOTTOM w0.5: v1(19.83,-24.24) 20.43,-24.84 U14.5
  vias: v1(20.16,-14.62) v1(20.76,-13.56) v1(21.17,-14.03) v1(21.66,-14.62)
LDO22-1:
  vias: v1(6.03,-13.4) v1(6.54,-13.02) v1(18.8,-15.03) v1(18.91,-14.52)
LPUART1_RX: length 10.1
  TOP w0.15: U6.12 v2(75.15,-28.6)
  TOP w0.2: U1.22 v2(74.55,-21)
  BOTTOM w0.15: v2(74.55,-21) 74.55,-25.94 74,-26.5 74,-27.45 v2(75.15,-28.6)
LPUART1_TX: length 16.4
  TOP w0.2: v2(74.05,-21.37) U1.21
  TOP w0.28: U6.1 v2(77.65,-26.55)
  BOTTOM w0.15: v2(74.05,-21.37) 73.76,-21.66 73.76,-23.8 72.98,-24.59 72.98,-27.97 74.18,-29.17 75.73,-29.17 76.1,-28.8 76.1,-27.95 76.35,-27.7 77.5,-27.7 77.65,-27.55 v2(77.65,-26.55)
OV_UART_RX: length 7.9
  TOP w0.28: U6.15 76.65,-28.56 76.89,-28.8 80.3,-28.8 80.73,-28.37 80.73,-27.83 80.3,-27.4 80.3,-26.91 80.51,-26.7 J1.1
OV_UART_TX: length 5.8
  TOP w0.28: U6.2 76.65,-25.1 76.95,-24.8 78.25,-24.8 78.9,-25.45 J1.2
ROUTE_A0: length 15.9
  TOP w0.15: U1.10 67.65,-17.65 67,-18.3 67,-19.7 69,-21.7 69,-22.6 70.14,-23.74 70.14,-25.94 72.16,-27.96 U6.10
ROUTE_A1: length 13.5
  TOP w0.15: U1.11 67.85,-18.15 67.5,-18.5 67.5,-19.4 69.5,-21.4 69.5,-22.4 70.89,-23.79 70.89,-25.82 72.12,-27.05 U6.9
SPI1_MISO: length 12.9
  TOP w0.15: U1.16 71.55,-22.05 72.4,-22.9 79.2,-22.9 80.4,-21.7 J1.5
SPI1_MOSI: length 12.3
  TOP w0.15: J1.6 80.5,-20.45 78.55,-22.4 72.9,-22.4 72.05,-21.55 U1.17
SPI1_NSS: length 14.3
  TOP w0.15: J1.3 79,-24.2 78.74,-23.94 71.94,-23.94 70.55,-22.55 U1.14
SPI1_SCK: length 13.5
  TOP w0.15: J1.4 80.35,-22.95 79.88,-23.42 72.22,-23.42 71.05,-22.25 U1.15
SPI2_MISO: length 5.7
  TOP w0.2: v1(78.8,-17.65) U1.27
  BOTTOM w0.15: v1(78.8,-17.65) 78.8,-17.23 80.08,-15.95 J3.4
SPI2_MOSI: length 6
  TOP w0.2: U1.28 v1(78,-17.15)
  BOTTOM w0.15: v1(78,-17.15) 78,-16.75 80.05,-14.7 J3.3
SPI2_NSS: length 4.8
  TOP w0.2: U1.25 v1(79.1,-18.65)
  BOTTOM w0.15: J3.6 80.5,-18.45 80.3,-18.65 v1(79.1,-18.65)
SPI2_SCK: length 5.1
  TOP w0.2: U1.26 v1(77.88,-18.15)
  BOTTOM w0.15: v1(77.88,-18.15) 79.55,-18.15 80.5,-17.2 J3.5
SYS_SWCLK: length 20.5
  TOP w0.127: v2(75.55,-10.7) U1.37
  BOTTOM w0.127: v2(75.55,-10.7) 75.55,-11.25 75.08,-11.72 69.86,-11.72 68.68,-12.9 64.57,-12.9 63.77,-12.1 60.21,-12.1 59.2,-13.11 J2.1
SYS_SWDIO: length 21.7
  TOP w0.2: v2(78.1,-14.15) U1.34
  BOTTOM w0.127: v2(78.1,-14.15) 77.45,-14.15 75.6,-12.3 70.1,-12.3 68.98,-13.42 64.29,-13.42 63.47,-12.6 60.96,-12.6 60.45,-13.11 J2.2
TX_EN: length 10.4
  TOP w0.127: v2(69.12,-27.55) U7.6
  TOP w0.2: U1.18 v2(72.55,-21)
  BOTTOM w0.127: v2(69.12,-27.55) 70.28,-27.55 72.03,-25.8 72.03,-23.7 72.55,-23.17 v2(72.55,-21)
TX_PWR_EN: length 6.3
  TOP w0.2: Q1.1 61.43,-27.13 61.77,-27.47 63.89,-27.47 63.97,-27.55 U7.15
  TOP w0.36: R6.2 60.4,-26.1 60.82,-26.52 Q1.1
USART2_RX: length 13.4
  TOP w0.15: v2(70.55,-18.76) 70.2,-18.76 70.05,-18.9 U1.13
  BOTTOM w0.15: J3.8 80.45,-20.95 79.69,-20.19 77.38,-20.19 75.95,-18.76 v2(70.55,-18.76)
USART2_TX: length 13.4
  TOP w0.15: U1.12 69.75,-18.65 v2(70.1,-18.3)
  BOTTOM w0.15: J3.7 77.99,-19.7 76.59,-18.3 v2(70.1,-18.3)
UV_SHDN: length 19.8
  TOP w0.2: v1(23.93,-25.52) 24.32,-25.52 24.32,-25.53 26.59,-25.53 29.78,-28.72 34.71,-28.72 35.98,-27.45 v1(35.98,-26.82)
  BOTTOM w0.2: R34.2 37.28,-25.83 U11.C2 ; v1(23.93,-25.52) U14.1
  BOTTOM w0.4: R34.2 36.52,-26.83 36.51,-26.82 v1(35.98,-26.82) 35.98,-26.3 35.98,-26.29 R28.1
VCAP: length 17.3
  TOP w0.46: R1.2 v1(22.8,-18.55)
  BOTTOM w0.36: v1(14.5,-25.55) R35.2
  BOTTOM w0.5: R20.2 R17.1 18,-18.81 18.26,-18.55 v1(21.26,-18.55) v1(22.8,-18.55) v1(24.45,-18.55) 27.05,-18.55 27.8,-19.3 R16.2 R19.2
  vias: v1(6.25,-24.42) v1(7.21,-24.41) v1(7.21,-25.65) v1(7.47,-23.31) v1(7.96,-22.85)
VCAP1: length 7
  BOTTOM w0.6: 13.5,-19.4 R17.2
  BOTTOM w1: 13.5,-19.4 13.5,-17.5 13.2,-17.2 C23.1
VCAP2: length 7.2
  BOTTOM w0.6: 32.1,-19.4 R16.1
  BOTTOM w1: 32.1,-19.4 33.2,-18.3 C22.1
N478267: length 10.6
  TOP w0.25: v1(6.39,-11.9) 6.39,-11.24 7.13,-10.51 v1(10.71,-10.51)
  BOTTOM w0.25: U9.4 v1(6.39,-11.9)
  BOTTOM w1: L4.1 16.91,-9.2 17.21,-9.5 TP2.1
N478345: length 9.2
  BOTTOM w0.25: U9.1 7.42,-13.4 6.8,-14.02 6.8,-14.78 6.18,-15.4 R13.1
  BOTTOM w0.36: R13.1 5.6,-16.11 5.89,-16.4 R15.2
N478365: length 7.9
  BOTTOM w0.127: R23.1 13.04,-23.98
  BOTTOM w0.25: U15.6 12.8,-26.3 13.36,-25.74 13.36,-24.89 13.04,-24.57 13.04,-23.98 13.97,-23.98 13.99,-24 C31.2
  BOTTOM w0.3: C31.2 14.9,-24 15.9,-25 R29.2
N478369: length 3
  BOTTOM w0.25: R10.1 6.58,-9.6 6.83,-9.85 6.83,-10.8 7.42,-11.4 U9.5
N479043: length 4.5
  BOTTOM w0.25: R35.1 13.82,-27.6 12.97,-26.75 U15.7
  BOTTOM w0.3: R35.1 15.18,-27.6 15.28,-27.5 R36.2
N485107: length 14.1
  TOP w0.3: v1(26.23,-11.9) 26.23,-11.13 26.87,-10.49 v1(30.53,-10.49)
  BOTTOM w0.25: U8.4 v1(26.23,-11.9)
  BOTTOM w1: L3.1 TP1.1
N485373: length 8.9
  BOTTOM w0.25: R12.1 26.18,-15.4 26.4,-15.18 26.4,-14.23 27.23,-13.4 U8.1
  BOTTOM w0.3: R14.2 25.92,-16.4 25.6,-16.08 R12.1
N485445: length 3.3
  BOTTOM w0.25: R9.1 26.2,-9.6 26.6,-10 26.6,-11.18 26.82,-11.4 U8.5
N490401: length 6.6
  BOTTOM w0.25: R19.1 26.91,-22.2 26.53,-21.82 26.53,-20.28 26.02,-19.77 U10.5
  BOTTOM w0.32: R18.2 28.45,-22.22 28.43,-22.2 R19.1
N490405: length 5.8
  BOTTOM w0.3: R20.1 19.01,-22.2 19.31,-21.9 19.31,-20.72 19.61,-20.42 20.1,-20.42 20.1,-20.42 U10.3
  BOTTOM w0.36: R21.2 17.39,-22.22 17.41,-22.2 R20.1
N490413: length 2.8
  BOTTOM w0.2: R22.2 38.48,-24.13 U11.A1
  BOTTOM w0.25: R22.2 C29.2
N490465: length 27.6
  TOP w0.2: v1(41.08,-25.93) 35.49,-25.93 35.01,-26.42 35.01,-27.26 34.31,-27.96 30.21,-27.96 25.54,-23.29 21.89,-23.29 v1(20.83,-22.23)
  BOTTOM w0.3: U10.1 21.52,-21.72 21.53,-21.72 21.58,-21.72 21.69,-21.61 21.69,-21.2 21.56,-21.07 U10.2
  BOTTOM w0.32: U10.1 v1(20.83,-22.23)
  BOTTOM w0.38: R33.2 v1(41.08,-25.93)
N490853: length 2.9
  BOTTOM w0.2: R34.1 38.48,-25.73 U11.C1
  BOTTOM w0.38: R34.1 R33.1
N490915: length 15.5
  TOP w0.2: v1(25.77,-20.71) 27.29,-22.23 30.68,-22.23 33.01,-24.55 33.01,-26.59 v1(33.58,-27.16)
  BOTTOM w0.2: R38.2 34.22,-27.38 34.01,-27.16 v1(33.58,-27.16)
  BOTTOM w0.32: U10.6 25.48,-20.42 v1(25.77,-20.71) 25.4,-21.07 U10.7
N490953: length 2.7
  BOTTOM w0.3: U14.2 23.88,-26.48 24.82,-27.42 U13.4
N491089: length 3
  BOTTOM w0.26: R27.2 31.31,-25.1 31.21,-25.2 U12.A1
  BOTTOM w0.42: R27.2 C35.2
N491611:
  vias: v1(46.17,-19.05) v1(46.89,-19.05) v1(48.21,-18.97) v2(47.58,-19.02) v2(48.5,-18.56)
N491653: length 2.9
  BOTTOM w0.26: R39.1 31.51,-27.04 U12.C1
  BOTTOM w0.38: R39.1 R38.1
N492453: length 11.5
  TOP w0.2: 49.4,-18.3 49.4,-17.7 49.65,-17.45 U2.3 ; 49.4,-18.3 49.4,-18.8 49.81,-19.21 51.22,-19.21 ; 49.4,-18.3 49.75,-17.95 U2.4 ; U2.5 51.05,-19.04 51.22,-19.21 ; 51.22,-19.21 53.07,-19.21 53.44,-18.84 53.44,-17.2 53.18,-16.95 U2.9
N504730: length 8.7
  TOP w0.25: Y1.1 66.7,-10.7 67.2,-11.2 67.2,-13.8 67.55,-14.15 U1.3
  TOP w0.5: C2.1 Y1.1
N504882: length 6.5
  TOP w0.25: U1.4 67.15,-14.65 66.5,-14 66.5,-13.55 66.25,-13.3 Y1.2
  TOP w0.5: C4.1 Y1.2
N512213: length 3.8
  TOP w0.25: U1.5 67.7,-15.15 67.11,-15.74 Y2.3
N512221: length 3.8
  TOP w0.5: R2.2 R3.1 61.8,-17.9 61.96,-17.74 Y2.1
N512229: length 4.6
  TOP w0.5: L2.2 60.3,-13.94 60.9,-14.54 C5.1 61.77,-15.1 62.41,-15.74 Y2.4
N517140: length 4.6
  TOP w0.3: U1.9 v2(70,-17.15)
  BOTTOM w0.3: v2(70,-17.15) 70.35,-17.15 70.4,-17.2 C24.2 70.9,-16.27 71.47,-15.7 L5.2
N518111: length 4.8
  TOP w0.3: v2(69.99,-16.15) U1.7
  BOTTOM w0.3: v2(69.99,-16.15) 69.99,-15.61 70.7,-14.9 C18.1 71.27,-14.9 71.52,-14.65 71.53,-14.65 72.12,-14.06 R11.1
N527048: length 22.8
  TOP w0.25: v1(56.5,-27.7) 57.78,-27.7 58.36,-28.27 59.48,-28.27 59.88,-28.68 Q1.3
  TOP w0.36: LD1.1 47.5,-30.15 47.91,-30.56 58.45,-30.56 59.18,-29.84 Q1.3
  BOTTOM w0.36: R31.1 R37.1 57.31,-28 57.01,-27.7 v1(56.5,-27.7) R40.1
N527184: length 6.1
  BOTTOM w0.5: LD1.2 47.5,-26.15 48.19,-25.46 50.06,-25.46 50.52,-25.91 Q2.3
N527198: length 13.9
  TOP w0.36: v1(52.04,-29.44) 52.51,-28.97 57,-28.97 57.05,-28.92 57.83,-28.92 57.88,-28.97 v1(59.2,-28.97) ; v2(62.03,-26.68) R7.2
  BOTTOM w0.36: R41.1 v1(59.2,-28.97) R37.2 60.71,-28 v2(62.03,-26.68) ; Q3.1 52.04,-30.02 v1(52.04,-29.44)
N527202: length 2.4
  BOTTOM w0.36: Q3.3 54.74,-29.53 55.11,-29.9 R40.2
N527222: length 7.2
  BOTTOM w0.36: Q2.1 54.77,-24.31 55.29,-23.79 57.46,-23.79 58,-24.33 R31.2 R30.1
N527434: length 5.1
  BOTTOM w0.36: Q3.2 52.41,-28.11 53.63,-26.89 Q2.2 55.62,-26.89 55.91,-26.6 R32.1
N541574: length 1.5
  TOP w0.46: R8.2 D3.2
N546758: length 11.2
  TOP w0.25: C10.2 R5.2 55.4,-21.7 55.01,-21.31 51.69,-21.31 51.1,-21.9 U5.4
  TOP w0.36: PD1.1 48.7,-24 49.1,-23.6 49.1,-23.6 50.2,-22.5 U5.4
N546765: length 6.9
  TOP w0.25: U3.2 58.15,-22.35 57.9,-22.6 57.9,-23.1 57.5,-23.5 C10.1 R5.1 55.4,-24 55,-24.4 U5.1
N549679: length 2.6
  TOP w0.36: U3.4 61.7,-23.3 62.65,-22.35 U4.2
N554827: length 1.3
  TOP w0.38: D2.2 R4.1
N555295: length 1.3
  TOP w0.46: R1.1 D1.2
N563900: length 1.9
  TOP w0.28: U7.18 64.65,-29.05 64,-28.4 R8.1
N602776: length 10.1
  TOP w0.2: R44.1 78.68,-9.2 78.32,-8.84 73.34,-8.84 72.98,-9.2 R45.1 72.2,-10.14 72.05,-10.29 U1.44

## Copper pours and planes (outline as drawn; the poured copper is in the pictures)
GND on TOP (solid shape): 65.97,-19.42 64.6,-19.42 64.6,-17.24 65.97,-17.24
GND on TOP (solid shape): 85.09,-18.35 80.7,-18.35 80.7,-17.55 85.09,-17.55
GND on TOP (solid shape): 86.75,-30.47 81.59,-30.47 81.59,-27.53 86.75,-27.53
GND on TOP (solid shape): 53.94,-16.58 51.95,-16.58 51.95,-16.33 52.62,-15.66 53.94,-15.66
GND on TOP (solid shape): 47.55,-17.24 47.6,-17.29 47.6,-18.2 45.65,-18.2 45.65,-15.64 47.55,-15.64
GND on TOP (solid shape): 51.6,-17.33 52.86,-17.33 52.86,-18.71 51.95,-18.71 51.95,-17.5 51,-17.5 51,-16.9 51.6,-16.9
GND on BOTTOM (solid shape): 4.8,-23.9 2.59,-23.9 2.59,-21.55 4.8,-21.55
GND on BOTTOM (solid shape): 28.27,-28.08 26.93,-28.08 26.93,-27.12 28.27,-27.12
GND on BOTTOM (solid shape): 82.95,-13.85 80.08,-13.85 80.08,-13.05 82.95,-13.05
GND on BOTTOM (solid shape): 86.5,-30.47 83.5,-30.47 83.5,-25.1 86.5,-25.1
GND on BOTTOM (solid shape): 17.47,-16.5 14.8,-16.5 14.8,-14.95 17.47,-14.95
GND on BOTTOM (solid shape): 37.47,-16.65 34.8,-16.65 34.8,-14.95 37.47,-14.95
GND on BOTTOM (solid shape): 17.4,-26.94 18.36,-27.9 18.95,-27.9 18.95,-30.4 17.45,-30.4 17.45,-28.6 16.8,-27.95 16.8,-25.5 17.4,-25.5
GND on BOTTOM (solid shape): 10.95,-27.6 10.45,-28.1 10.45,-30.4 8.45,-30.4 8.45,-28.6 9.21,-28.6 9.95,-27.87 9.95,-26.88 8.6,-26.88 8.6,-26.17 9.95,-26.17 9.95,-25.43 10.95,-25.43
GND on BOTTOM (solid shape): 28.4,-10.1 27.2,-10.1 27.2,-8.7 24.9,-8.7 24.76,-8.76 24.7,-8.9 24.7,-10 25.5,-10.8 25.5,-12 24.1,-12 24.1,-8.05 28.4,-8.05
GND on BOTTOM (solid shape): 8.8,-10.1 7.6,-10.1 7.6,-8.7 5.3,-8.7 5.16,-8.76 5.1,-8.9 5.1,-10 5.14,-10.18 5.24,-10.34 5.7,-10.8 5.7,-12 4.3,-12 4.3,-8.05 8.8,-8.05
P1V8 on TOP (solid shape): 70.2,-12.6 69.5,-13.3 68,-13.3 68,-11.1 70.2,-11.1
P1V8 on TOP (solid shape): 55.8,-12.75 58.42,-12.75 59.64,-11.53 59.64,-11.25 60.8,-11.25 60.8,-12.15 59.64,-12.15 58.6,-13.19 58.6,-14.25 56.8,-14.25 56.25,-14.8 52.8,-14.8 51.67,-15.92 51.67,-16.55 51.42,-16.55 51.42,-15.66 52.8,-14.28 52.8,-8.8 55.8,-8.8
P3V3 on TOP (solid shape): 85.09,-19.6 80.7,-19.6 80.7,-18.8 85.09,-18.8
P3V3 on BOTTOM (solid shape): 82.95,-12.6 80.08,-12.6 80.08,-11.8 82.95,-11.8
P3V3 on BOTTOM (solid shape): 45.06,-22.03 43.74,-22.03 43.74,-19.95 45.06,-19.95
P3V3 on BOTTOM (solid shape): 13.9,-28.6 15.65,-28.6 15.65,-30.4 11.7,-30.4 11.7,-27.7 11.4,-27.4 11.4,-27.08 12.38,-27.08
P3V3 on VCC (solid shape): 45.06,-29.4 44.77,-30.11 44.06,-30.4 11.75,-30.4 11.75,-27.56 14.94,-27.56 15.42,-27.07 15.42,-23.82 14.78,-23.17 12.69,-23.17 12.54,-23.02 12.54,-22.44 12.74,-22.24 15.49,-22.24 16.36,-23.11 16.36,-28.39 17.24,-29.27 42.74,-29.27 43.45,-28.97 43.74,-28.27 43.74,-20.85 45.06,-20.85
LDO22 on BOTTOM (solid shape): 22.1,-14.95 19.83,-14.95 19.83,-13.23 22.1,-13.23
LDO22-1 on BOTTOM (solid shape): 19.23,-15.31 18.48,-15.31 18.48,-13.23 19.23,-13.23
LDO22-1 on BOTTOM (solid shape): 8.1,-13.02 7.16,-13.02 6.97,-13.06 6.82,-13.17 5.78,-14.2 4.3,-14.2 4.3,-13 5.7,-13 5.78,-12.92 5.94,-12.81 6.12,-12.77 8.1,-12.77
LDO22-1 on VCC (solid shape): 7.72,-13.46 11.62,-13.46 12.23,-14.08 19.04,-14.08 19.23,-14.27 19.23,-15.31 18.48,-15.31 17.85,-14.68 10.27,-14.68 9.44,-13.85 6.14,-13.85 5.87,-14.11 5.5,-14.11 5.07,-13.68 5.07,-13.56 6.1,-12.52 6.78,-12.52
LDO22-2 on BOTTOM (solid shape): 27.9,-13.02 26.95,-13.02 26.77,-13.06 26.61,-13.17 25.58,-14.2 22.7,-14.2 22.7,-13.4 22.96,-13.14 23.12,-13.04 23.3,-13 25.5,-13 25.58,-12.92 25.74,-12.81 25.93,-12.77 27.9,-12.77
VCAP on BOTTOM (solid shape): 9.4,-23.1 8.32,-23.1 7.75,-23.67 7.75,-24.88 8.3,-25.43 9.4,-25.43 9.4,-25.98 4.5,-25.98 4.5,-24.88 5.07,-24.88 5.8,-24.14 5.8,-22.5 9.4,-22.5
VCAP1 on BOTTOM (solid shape): 11.77,-12.77 11.95,-12.81 12.11,-12.92 12.31,-13.12 12.41,-13.28 12.45,-13.46 12.45,-15 12.48,-15.07 12.55,-15.1 13.8,-15.1 13.8,-16.5 12.6,-16.5 11.67,-15.57 11.59,-15.52 11.5,-15.5 10.2,-15.5 10.2,-14.9 11.19,-14.9 11.28,-14.88 11.36,-14.83 11.76,-14.43 11.81,-14.35 11.83,-14.26 11.83,-13.34 11.81,-13.25 11.76,-13.17 11.68,-13.1 11.6,-13.04 11.51,-13.02 10.2,-13.02 10.2,-12.77
VCAP2 on BOTTOM (solid shape): 31.28,-12.77 31.47,-12.81 31.62,-12.92 32.21,-13.5 32.31,-13.66 32.35,-13.84 32.35,-14.9 32.41,-15.04 32.55,-15.1 33.8,-15.1 33.8,-16.5 32.59,-16.5 32.41,-16.46 32.25,-16.36 31.53,-15.64 31.38,-15.54 31.19,-15.5 30,-15.5 30,-14.9 31.04,-14.9 31.22,-14.86 31.38,-14.76 31.61,-14.53 31.71,-14.37 31.75,-14.19 31.75,-13.76 31.71,-13.58 31.61,-13.42 31.35,-13.17 31.2,-13.06 31.01,-13.02 30,-13.02 30,-12.78
N478267 on BOTTOM (solid shape): 15.5,-9.73 12.75,-9.73 12.57,-9.76 12.41,-9.87 11,-11.27 11,-11.52 10.2,-11.52 10.2,-10.7 10.16,-10.52 10.06,-10.36 9.8,-10.1 9.8,-8.67 15.5,-8.67
N478271 on BOTTOM (solid shape): 12.45,-11.77 12.73,-11.83 12.96,-11.99 14.05,-13.08 15.5,-13.08 15.5,-14.12 13.3,-14.12 13.3,-13.09 12.37,-12.16 12.21,-12.06 12.03,-12.02 10.2,-12.02 10.2,-11.77
N478287 on BOTTOM (solid shape): 9.4,-27.61 8.36,-27.61 6.7,-29.27 6.7,-30.33 4.5,-30.33 4.5,-29.27 6.07,-29.27 8.27,-27.08 9.4,-27.08
N478385 on BOTTOM (solid shape): 11,-13.52 10.75,-13.52 9.3,-14.97 9.3,-15.8 8.7,-15.8 8.7,-14.84 8.88,-14.84 10.2,-13.52 10.2,-13.27 11,-13.27
N485107 on BOTTOM (solid shape): 35.1,-9.73 32.55,-9.73 32.37,-9.76 32.21,-9.87 30.8,-11.27 30.8,-11.52 30,-11.52 30,-10.3 29.94,-10.16 29.8,-10.1 29.4,-10.1 29.4,-8.67 35.1,-8.67
N485115 on BOTTOM (solid shape): 32,-11.78 32.19,-11.82 32.34,-11.92 33.36,-12.93 33.51,-13.04 33.7,-13.08 35.1,-13.08 35.1,-14.13 32.9,-14.13 32.9,-13.37 32.86,-13.19 32.76,-13.03 31.89,-12.17 31.74,-12.06 31.55,-12.02 30,-12.02 30,-11.78
N485483 on BOTTOM (solid shape): 30.8,-13.52 30.57,-13.52 29.1,-15 29.1,-15.8 28.5,-15.8 28.5,-14.84 28.68,-14.84 30,-13.52 30,-13.27 30.8,-13.27
N491611 on TOP (solid shape): 49.91,-16.33 50.65,-16.33 50.65,-17.08 49.05,-17.08 48.8,-17.33 48.8,-19.3 45.7,-19.3 45.7,-18.8 47.86,-18.8 48.2,-18.46 48.2,-17.29 48.25,-17.24 48.25,-15.7 49.28,-15.7
N491611 on BOTTOM (solid shape): 48.8,-19.3 43.84,-19.3 43.84,-18.28 48.8,-18.28
N492211 on TOP (solid shape): 49.5,-13.98 51.17,-15.66 51.17,-16.55 50.92,-16.55 50.92,-15.85 49.88,-14.8 46.5,-14.8 46.5,-8.8 49.5,-8.8

Small or netless copper shapes (teardrops, artwork), in the pictures only: 3 on TOP

## Text on the board
Ref Des/Silkscreen Bottom: LDO22 | EXCLUSIVE | PHOTOVOLTAIC | ENERGY HARVESTER | GLPP2024-PSU-A1 | NO BUGS PERMANENTLY | NO POLARITY PROTECTION | WARNING
Ref Des/Silkscreen Top: ENERGY HARVESTER | PHOTOVOLTAIC | GLPP2024-PSU-A1
XSECTION_CHART: *  SURFACE | L1 TOP CONDUCTOR | *  DIELECTRIC | L2 GND CONDUCTOR | L3 VCC CONDUCTOR | L4 BOTTOM CONDUCTOR | DESIGN CROSS SECTION CHART | ___________________________ | TOTAL THICKNESS 1.0212 MM | 1-4
DIMENSION: 4 LAYERS PCB STACK, 1.0mm THINKNESS, NO IMPEDANCE MATCH DEMAND. | ANY QUESTIONS PLEASE CONTACT ME: +8613522296239 | FIGURE | FINISHED_SIZE | 0.15 | 0.2 | 0.9 | 1.0 | 1.2 | 1.8 | 3.0 | DRILL CHART: TOP to BOTTOM | ALL UNITS ARE IN MILLIMETERS | PLATED | NON-PLATED | QTY | 43 | 197 | 2 | 4 | 3
